# Altium PCB DA_TN.PcbDoc
Units mm, origin at the board's own origin, x right, y up, seen from the top; angles counter-clockwise.
Board outline 99.06 x 62.23 mm, 2 copper layers (Top Layer, Bottom Layer); 55 components, 38 nets, 186 pads, 97 vias.
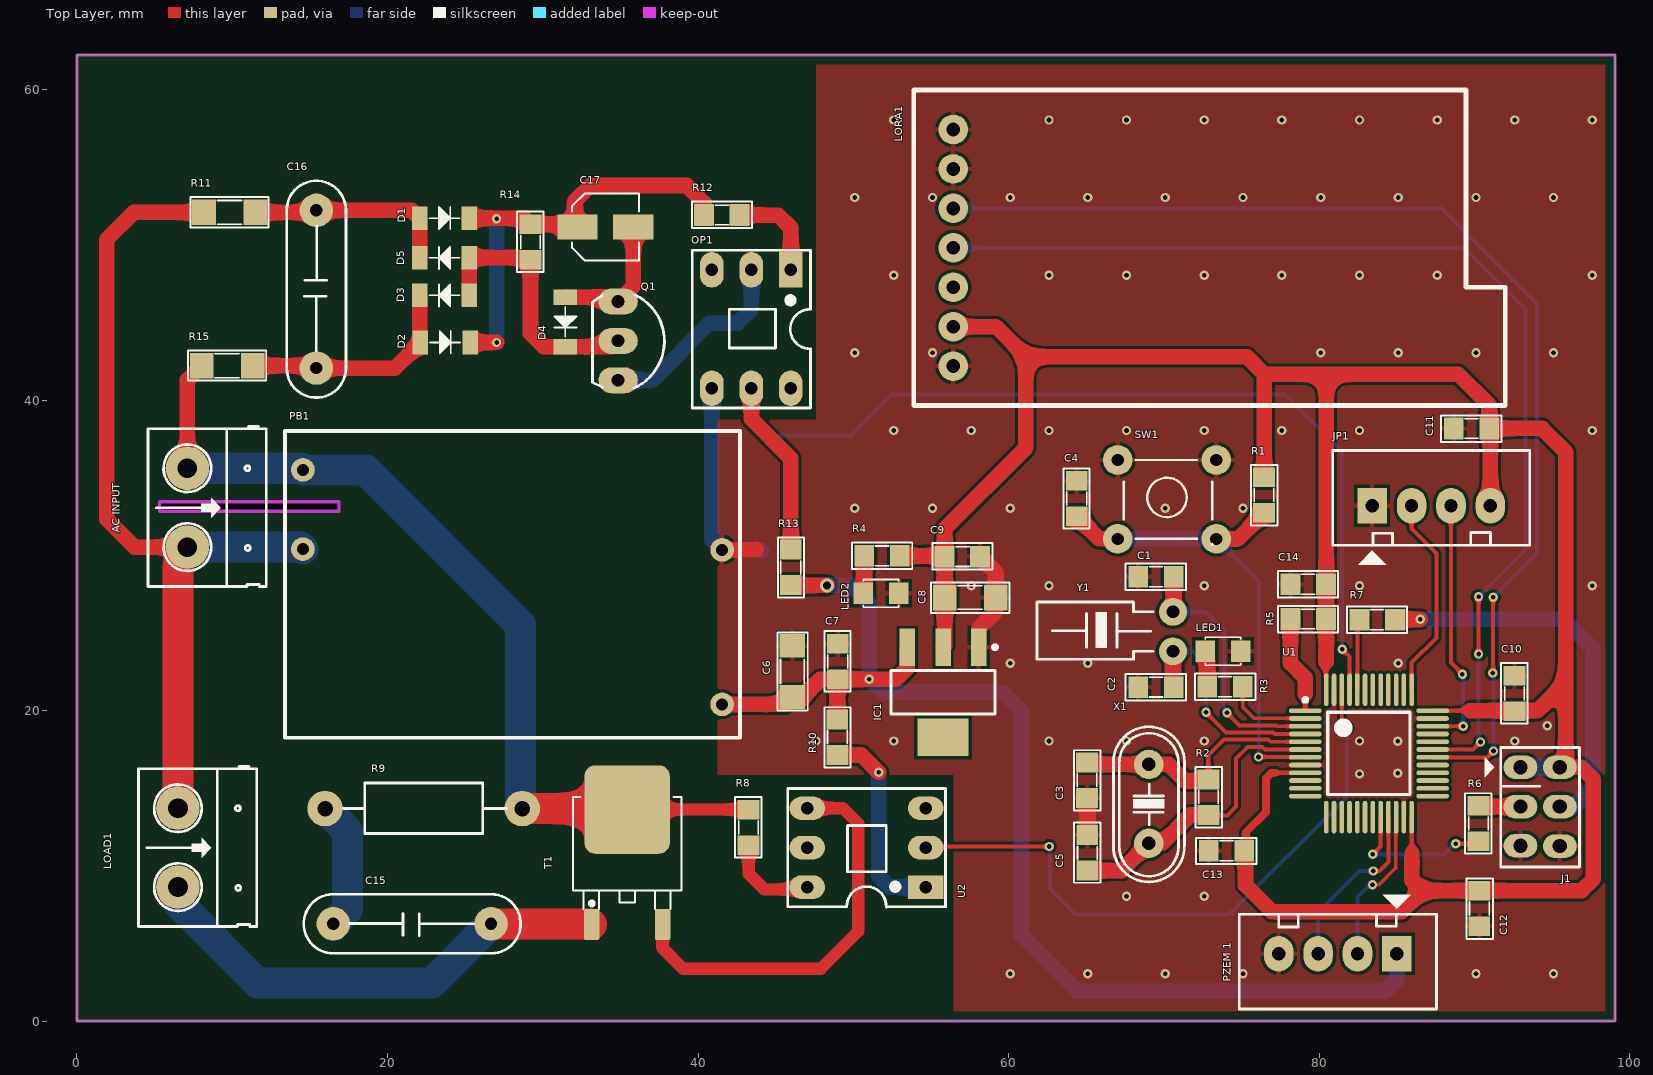
[diagram p0: Top Layer view]
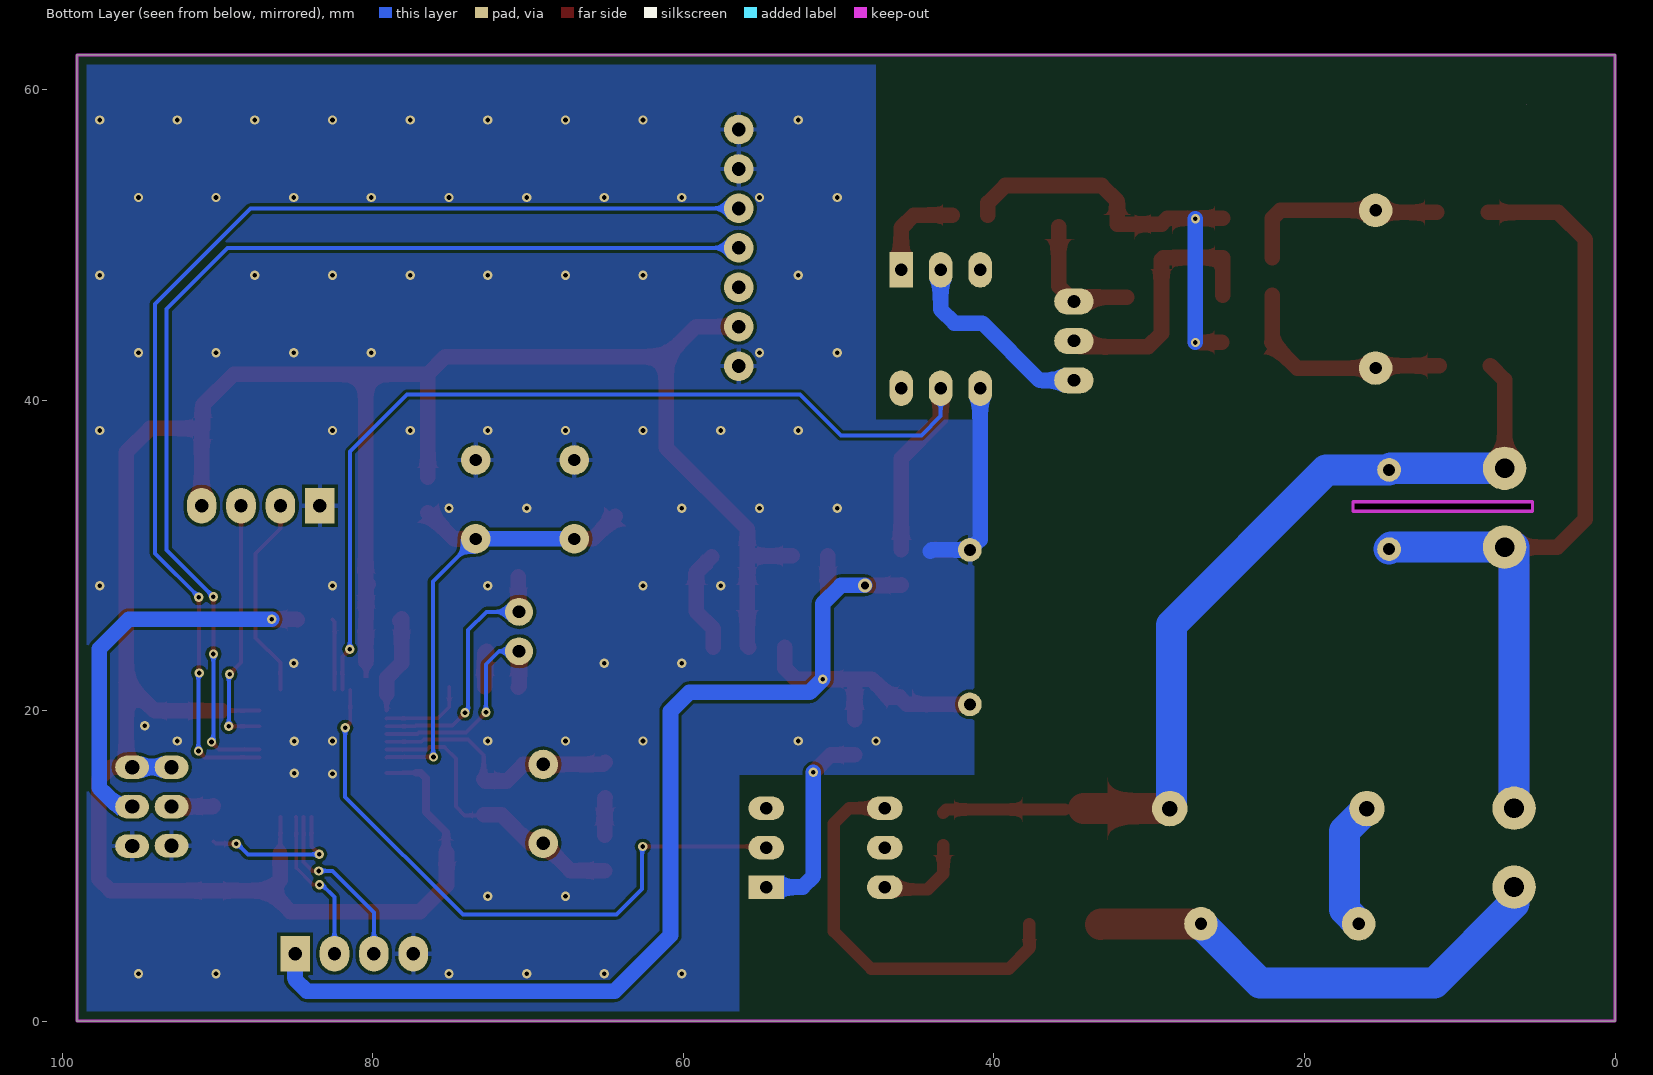
[diagram p1: Bottom Layer view, seen from below]
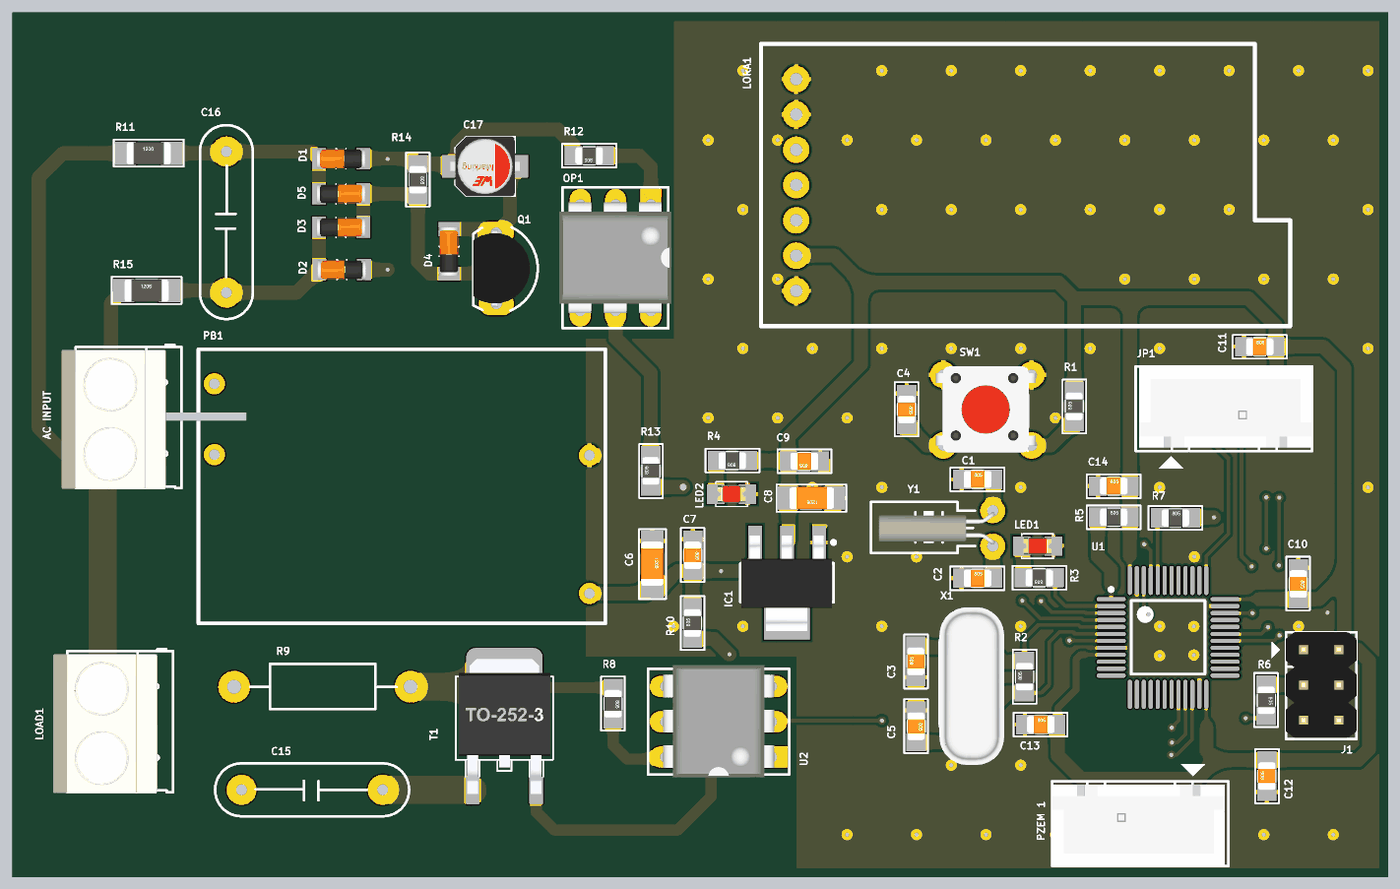
[diagram p2: 3D render of the assembled board from above, using the file's embedded part models]

## Layer stack, top to bottom
Top Solder: solder mask 0.0102, Solder Resist, Dk 3.5
Top Layer: signal copper 0.0356
Dielectric 1: dielectric 0.32, FR-4, Dk 4.8
Bottom Layer: signal copper 0.0356
Bottom Solder: solder mask 0.0102, Solder Resist, Dk 3.5

## Board outline
0,0 99.06,0 99.06,62.23 0,62.23
cut-out: 5.309,33.452 16.866,33.452 16.866,32.842 5.309,32.842

## Design rules (kind name [scope] priority, off if disabled: settings)
Clearance [All] p1: gap=0.2 ignorepadtopadclearanceinfootprint=FALSE
PolygonConnect [All] p1: thpad.connectstyle=Relief thpad.reliefconductorwidth=0.3 thpad.reliefentries=4 thpad.polygonreliefangle="90 Angle" thpad.airgapwidth=0.2 smdpad.connectstyle=Relief smdpad.reliefconductorwidth=0.3 smdpad.reliefentries=4 smdpad.polygonreliefangle="90 Angle" smdpad.airgapwidth=0.2 via.connectstyle=Direct via.reliefconductorwidth=0.3 via.reliefentries=4 via.polygonreliefangle="90 Angle" via.airgapwidth=0.2
RoutingVias [All] p1: holewidth=0.3 width=0.6 viastyle="Through Hole" minholewidth=0.3 minwidth=0.6 maxholewidth=0.3 maxwidth=0.6
SolderMaskExpansion [All] p1: expansion=0.102
Width [All] p1: maxlimit=2 minlimit=0.254 preferedwidth=0.254
30 further rules are at their usual default settings.

## Components (designator, comment, footprint, x,y, rotation, side; value= is the part's Value field where it differs from the comment)
"AC INPUT" "AC INPUT" HED2 7.112,35.611 r270 top value="Header 2"
C1 "20p, 0805" SM-CAP-0805 68.351,28.626 r0 top value=0,1uF/300V
C2 "20p, 0805" SM-CAP-0805 68.351,21.514 r0 top value=0,1uF/300V
C3 "20p, 0805" SM-CAP-0805 65.049,14.376 r90 top value=0,1uF/300V
C4 "105, 0805" SM-CAP-0805 64.389,34.798 r270 top value=0,1uF/300V
C5 "20p, 0805" SM-CAP-0805 65.075,11.989 r270 top value=0,1uF/300V
C6 "10uF, 1206" SM-Cap-1206 46.076,24.181 r270 top value=0,1uF/300V
C7 "0.1uF, 0805" SM-CAP-0805 48.997,24.308 r270 top value=0,1uF/300V
C8 "10uF, 1206" SM-Cap-1206 59.182,27.28 r180 top value=0,1uF/300V
C9 "0.1uF, 0805" SM-CAP-0805 58.166,29.921 r180 top value=0,1uF/300V
C10 "100nF, 0805" SM-CAP-0805 92.583,22.25 r270 top value=0,1uF/300V
C11 "105, 0805" SM-CAP-0805 88.671,38.176 r0 top value=0,1uF/300V
C12 "100nF, 0805" SM-CAP-0805 90.322,6.121 r90 top value=0,1uF/300V
C13 "100nF, 0805" SM-CAP-0805 72.898,10.973 r0 top value=0,1uF/300V
C14 "100nF, 0805" SM-CAP-0805 78.156,28.143 r0 top value=0,1uF/300V
C15 "474" CN4 26.67,6.274 r180 top value=0.47uF
C16 "474" CN4 15.418,42.062 r90 top value=0.47uF
C17 "10uF/10V" CAP-ALU-SMD-4.5x5x1.4 34.039,51.156 r0 top
D1 "LL4148" DIO-SMD-4148 23.673,51.714 r0 top
D2 "LL4148" DIO-SMD-4148 23.724,43.713 r0 top
D3 "LL4148" DIO-SMD-4148 23.673,46.761 r180 top
D4 "LL4148" DIO-SMD-4148 31.445,45.034 r270 top
D5 "LL4148" DIO-SMD-4148 23.673,49.174 r180 top
IC1 "LM1117" SOT223-4N 55.778,21.184 r270 top value=LM317
J1 "Connector 3x2" JP3x2 94.234,13.818 r270 top
JP1 "SWD" CON4 83.414,33.198 r0 top value="Connector 4"
LED1 "LED SMD" SM-LED-0805-Red 72.669,23.825 r0 top
LED2 "LED SMD" SM-LED-0805-Red 50.648,27.559 r0 top
LOAD1 "Header 2" HED2 6.502,13.716 r270 top
LORA1 "SX1278_UART" sx1278_UART 56.439,42.189 r90 top
OP1 "4N35" DIP6/W0.3 45.974,48.387 r180 top
PB1 "PB?" "Module 5V700mA 5V AC*DC" 13.404,18.254 r0 top
"PZEM 1" "JP4" CON4 85.014,4.343 r180 top value="Connector 4"
Q1 "C9014" QTO-92 34.849,43.815 r270 top
R1 "10k, 0805" SM-RES-0805 76.454,32.741 r90 top value="R1/4W - 1K"
R2 "1M, 0805" SM-RES-0805 72.873,13.284 r90 top value="R1/4W - 1K"
R3 "220, 0805" SM-RES-0805 75.082,21.539 r180 top value="R1/4W - 1K"
R4 "220, 0805" SM-RES-0805 52.984,29.972 r180 top value="R1/4W - 1K"
R5 "100k, 0805" SM-RES-0805 78.156,25.908 r0 top value="R1/4W - 1K"
R6 "100k, 0805" SM-RES-0805 90.272,13.868 r270 top value="R1/4W - 1K"
R7 "100k, 0805" SM-RES-0805 82.601,25.857 r0 top value="R1/4W - 1K"
R8 "220, 0805" SM-RES-0805 43.256,13.614 r270 top value="R1/4W - 1K"
R9 "39 1W" R1W 15.977,13.691 r0 top value="R1W - 100"
R10 "220, 0805" SM-RES-0805 48.971,17.145 r90 top value="R1/4W - 1K"
R11 "220k, 1206" SM-RES-1206 8.179,52.095 r0 top value="R1/4W - 1K"
R12 "1k, 0805" SM-RES-0805 42.672,51.918 r180 top value="R1/4W - 1K"
R13 "4.7k, 0805" SM-RES-0805 45.974,28.092 r90 top value="R1/4W - 1K"
R14 "22k, 0805" SM-RES-0805 29.21,51.333 r270 top value="R1/4W - 1K"
R15 "220k, 1206" SM-RES-1206 8.026,42.215 r0 top value="R1/4W - 1K"
SW1 "SW" SW4 67.031,36.144 r0 top value="Button chip 4 pin"
T1 "BT137" TO252-BCE 35.433,9.931 r0 top
U1 "STM32F103C8T6" LQFP48_M 83.21,17.247 r0 top
U2 "MOC3020" DIP6/W0.3 54.661,8.636 r90 top value=MOC3021
X1 "8Mhz" XT2 69.037,13.995 r90 top value=4Mhz
Y1 "XT2" XT32k 70.587,23.825 r180 top

## Footprints (in the part's own frame and the unit in brackets; to place one, negate y for a bottom-side part, rotate by r counter-clockwise, add the part's x,y. Pads: shape width x height; smd on the part's side, far side on the other; paste and mask are expansions set on the pad)
CAP-ALU-SMD-4.5x5x1.4 [mm]
  rect 2.6x1.6 smd: 1(-1.8,0) 2(1.8,0)
  silkscreen extent -2.15,-2.15 2.15,2.15, body extent -2.5,-2.15 2.5,2.15, height 5.45
CN4 [mil] "Cap np W 0.4"
  round 85 hole 31: 1(0,0) 2(400,0)
  silkscreen extent -75,-75 475,75
CON4 [mil] "CON4"
  rect 75x90 hole 34: 1(0,0)
  oval 75x90 hole 34: 2(100,0) 3(200,0) 4(300,0)
  silkscreen extent -100,-150 400,140, body extent -90,-90 398,136, height 276
DIO-SMD-4148 [mm]
  rect 1x1.524 smd: 1(-1.6,0) 2(1.6,0)
  silkscreen extent -0.99,-0.71 0.97,0.74, body extent -1.75,-0.74 1.75,0.71, height 1.41
DIP6/W0.3 [mil] "6 PIN, W 300mil, Pin to pin 100mil"
  rect 60x90 hole 31.5: 1(0,0)
  oval 60x90 hole 31.5: 2(100,0) 3(200,0) 4(200,300) 5(100,300) 6(0,300)
  silkscreen extent -50,-50 250,350, body extent -58,-7 260,307, height 170
HED2 [mil] "Header 2, 2 pin, hight 300mil, Pin to Pin 200, Colour Green"
  round 110 hole 50: 1(0,0) 2(200,0)
  silkscreen extent -106,-100 300,200, body extent -92,-140 302,155, height 394
JP3x2 [mil] "Connector 3x2"
  oval 60x86 hole 36: 1(-100,-50) 2(0,-50) 3(99,-50) 4(-100,50) 5(0,50) 6(100,50)
  silkscreen extent -150,-141 153,100, body extent -150,-100 150,100, height 335
LQFP48_M [mm] "Thin QFP, 48-Leads, Body 7x7mm, Pitch 0.5mm, IPC Low Density"
  oval 2.1x0.3 smd: 1(-4.1,2.75) 2(-4.1,2.25) 3(-4.1,1.75) 4(-4.1,1.25) 5(-4.1,0.75) 6(-4.1,0.25) 7(-4.1,-0.25) 8(-4.1,-0.75) 9(-4.1,-1.25) 10(-4.1,-1.75) 11(-4.1,-2.25) 12(-4.1,-2.75) 25(4.1,-2.75) 26(4.1,-2.25) 27(4.1,-1.75) 28(4.1,-1.25) 29(4.1,-0.75) 30(4.1,-0.25) 31(4.1,0.25) 32(4.1,0.75) 33(4.1,1.25) 34(4.1,1.75) 35(4.1,2.25) 36(4.1,2.75)
  oval 0.3x2.1 smd: 13(-2.75,-4.1) 14(-2.25,-4.1) 15(-1.75,-4.1) 16(-1.25,-4.1) 17(-0.75,-4.1) 18(-0.25,-4.1) 19(0.25,-4.1) 20(0.75,-4.1) 21(1.25,-4.1) 22(1.75,-4.1) 23(2.25,-4.1) 24(2.75,-4.1) 37(2.75,4.1) 38(2.25,4.1) 39(1.75,4.1) 40(1.25,4.1) 41(0.75,4.1) 42(0.25,4.1) 43(-0.25,4.1) 44(-0.75,4.1) 45(-1.25,4.1) 46(-1.75,4.1) 47(-2.25,4.1) 48(-2.75,4.1)
  silkscreen extent -4.22,-2.65 2.65,3.57, body extent -3.5,-3.5 3.5,3.5, height 1.6
"Module 5V700mA 5V AC*DC" [mil]
  round 60 hole 30: 1(45.28,679.13) 2(45.28,478.35) 3(1108.27,476.38) 4(1108.27,84.65)
  silkscreen extent 0,0 1154,778, body extent -70,0 1154,778, height 472
QTO-92 [mil] "TO-92"
  oval 66x100 hole 32: 1(-100,0) 2(0,0) 3(100,0)
  silkscreen extent -117,-65 120,118, body extent -109,-66 109,95, height 245
R1W [mil] "R 1W, 2 pin, 500mil"
  round 90 hole 39.37: 1(0,0) 2(500,0)
  silkscreen extent 46,-63 460,65
SM-CAP-0805 [mil]
  rect 50x55 smd: 1(0,0) 2(90,0)
  silkscreen extent -32,-34 121,33, body extent 6,-25 84,25, height 31
SM-Cap-1206 [mil]
  rect 60x65 smd: 1(0,0) 2(130,0)
  silkscreen extent -34,-38 164,39, body extent 1,-31 127,32, height 40
SM-LED-0805-Red [mil]
  rect 50x55 smd: 1(0,0) 2(90,0)
  silkscreen extent 0,-35 90,35, body extent 5,-25 85,25, height 43
SM-RES-0805 [mil]
  rect 50x55 smd: 1(0,0) 2(90,0)
  silkscreen extent -32,-34 121,33, body extent 6,-25 84,25, height 31
SM-RES-1206 [mil]
  rect 60x65 smd: 1(0,0) 2(130,0)
  silkscreen extent -34,-38 164,39, body extent 2,-31 128,32, height 40
SOT223-4N [mm] "SOT223, 4-Leads, Body 6.5x3.5mm, Pitch 2.3mm, Lead Span 7mm, IPC Medium Density"
  rect 2.4x1 smd: 1(-2.9,2.3) 2(-2.9,0) 3(-2.9,-2.3)
  rect 2.4x3.3 smd: 4(2.9,0)
  silkscreen extent -3.02,-3.35 1.4,3.48, body extent -3.39,-3.27 3.5,3.23, height 1.72
SW4 [mil] "SW button 4pin, 250 x250 mil"
  round 75 hole 31: 1(0,0) 2(250,-200) 3(250,0) 4(0,-200)
  silkscreen extent 15,-215 240,0, body extent -36,-220 276,24, height 276
sx1278_UART [mil] "LORA"
  round 75 hole 35: 1(0,0) 2(100,0) 3(200,0) 4(300,0) 5(400,0) 6(500,0) 7(600,0)
  silkscreen extent -100,-1400 700,100
TO252-BCE [mm]
  round 0.5 on Mech15: 0(0,0)
  rrect25% 1x2 smd: 1(-2.285,-3.7) 3(2.285,-3.7)
  rrect25% 5.5x5.7 smd: 2(0,3.7)
  silkscreen extent -3.5,-2.7 3.5,4.5, body extent -3.3,-3.95 3.3,5.76, height 2.31
XT2 [mil] "Footpin for Crystal 2 pin"
  round 75 hole 34: 1(-100,0) 2(100,0)
  silkscreen extent -198,-90 195,90, body extent -233,-93 213,90, height 138
XT32k [mm]
  round 1.8 hole 0.813: 1(0,0) 2(0,-2.54)
  silkscreen extent 1.27,-3.17 8.76,0.51, body extent -0.15,-2.42 8.2,-0.12, height 1.95

## Part data
"AC INPUT" LOAD1: library part Hed2, "Header 2 (Green)"
C1 C2 C3 C4 C5 C6 C7 C8 C9 C10 C11 C12 C13 C14: library part CN, Designed by=VanDungEvn
C15 C16: library part CN4, "Cap np W0.4"
C17: library part CN-ALU-SMD, "Polarized Capacitor (Axial)", LatestRevisionDate=17-Jul-2002, LatestRevisionNote="Re-released for DXP Platform.", PackageReference=POLAR0.8, Published=8-Jun-2000, Publisher="Altium Limited"
D1 D2 D3 D4 D5: library part "Diode SMD", "STMICROELECTRONICS         1N5711            Small Signal Schottky Diode, Single, 70 V, 15 mA, 410 mV, 200 C", Revision="July-2002: Re-released for DXP Platform."
IC1: "Available in 1.8V, 2.5V, 2.85V, 3.3V, 5V, and  Adjustable Versions"
J1: library part JP3x2
JP1 "PZEM 1": library part Con4, "Connector 4"
LED1 LED2: library part LED-SMD-0805
OP1: "Opto"
PB1: library part "Module 5V 700mA AC-DC"
Q1: library part NPN_EBC, "P 600mW, EBC", =C9012
R1 R2 R3 R4 R5 R6 R7 R8 R10 R12 R13 R14: library part R1/4W, "Resistor 1/4W"
R9: library part R1W, "Resistor 1W"
R11 R15: library part R, "Resistor 1/4W"
SW1: library part SW4, "Switch button 4 pin"
T1: "NXP         BT137-600            Triac, 600 V, 5 W, 1.5 V, TO-220, 65 A"
U1: "STM32 ARM-based 32-bit MCU with 64 Kbytes Flash, 48-pin LQFP, Industrial Temperature", ComponentLink1Description="Manufacturer Link", ComponentLink1URL=www.st.com/stm32, ComponentLink2Description=Datasheet, ComponentLink2URL=http://www.st.com/stonline/products/literature/ds/13587.pdf, DatasheetVersion="rev6, Mar-2008", PackageDescription="48-Pin Low-Profile Quad Flat Pack, 7 x 7 mm Body, 0.5 mm Pitch (LQFP48)", PackageReference=LQFP48, PackageVersion=Mar-2008, Published=30-May-2008, Publisher="Altium Limited"
U2: library part MOC3021, "Single Opto"
X1: library part XT2, "Crystal For all Crystal 2pin."
Y1: "20MHz ±20ppm Crystal 18pF 40 Ohm -20°C ~ 70°C  Surface Mount HC49/US"

## Via types
v1: diameter 0.6, hole 0.3, Top Layer to Bottom Layer, 72 vias
v2: diameter 0.6, hole 0.3, Top Layer to Bottom Layer, tented both sides, 24 vias
v3: diameter 0.9, hole 0.5, Top Layer to Bottom Layer, tented both sides, 1 vias

## Nets (pads, with @x,y where several pads share a name; then routed paths per layer and width w, separated by ;. In a path a pad name is that pad's centre, name@x,y a point inside that pad or via, vN(x,y) a via of type N, cw(c..) or ccw(c..) an arc to the next point about the centre after c; other vN are vias at no path point)
+3.3: C8.2 C9.2 C10.2 C11.2 C12.2 C13.2 C14.2 IC1.2 J1.1 J1.4 JP1.4 LORA1.2 R1.2 R4.1 R5.2 U1.9 U1.24 U1.36 U1.48 | length 175.9
  Top Layer w0.254: 77.191,15.997 U1.9 ; 85.96,11.633 U1.24 ; U1.36 88.741,19.997
  Top Layer w0.5: C13.2@75.286,10.871 75.286,12.167 76.581,13.462 76.581,15.646 76.931,15.997 77.191,15.997 ; 85.96,10.179 85.979,10.16
  Top Layer w1: R4.1 55.829,29.972 C9.2 ; IC1.2 55.88,24.185 C8.2 C9.2 ; LORA1.2 59.182,44.729 61.112,42.799 ; C13.2@75.286,10.871 75.26,10.846 75.26,8.763 76.962,7.061 85.319,7.061 86.665,8.407 ; R1.2 76.454,41.656 ; C14.2@80.289,28.143 C14.2@80.467,28.321 ; C14.2 R5.2 80.46,25.889 80.46,23.673 ; 80.467,27.076 C14.2@80.467,28.321 ; 85.979,10.16 85.979,9.093 86.665,8.407 ; 90.195,19.997 94.063,19.997 95.885,21.819 ; JP1.4 91.034,38.1 C11.2 ; C9.2 55.88,31.699 61.112,36.932 61.112,42.799 ; 61.112,42.799 75.336,42.799 76.454,41.681 76.454,41.656 ; 76.454,41.656 80.467,41.656 ; C14.2@80.467,28.321 80.467,41.656 ; 80.467,41.656 88.976,41.656 90.957,39.675 C11.2 ; 86.665,8.407 C12.2 96.901,8.407 97.663,9.169 97.663,15.57 96.876,16.358 J1.4 95.885,16.739 95.885,21.819 ; C11.2 94.361,38.176 95.885,36.652 95.885,21.819
  Bottom Layer w1: J1.1 J1.4
+5: "PZEM 1.1" C6.2 C7.2 IC1.3 PB1.4 R10.2 R13.1 | length 80
  Top Layer w1: PB1.4 45.601,20.404 C6.2 46.736,20.879 47.879,22.022 C7.2 ; R13.1 45.999,28.067 v3(48.311,28.067) ; R10.2 48.971,21.996 C7.2 ; IC1.3 53.478,22.744 52.756,22.022 v2(51.029,22.022) C7.2
  Bottom Layer w1: v3(48.311,28.067) 49.86,28.067 51.029,26.899 v2(51.029,22.022) 51.867,21.184 59.614,21.184 60.833,19.964 60.833,5.537 64.44,1.93 84.252,1.93 85.014,2.692 85.014,4.343
AC1: "AC INPUT.1" PB1.1 R8.1 R9.2 R15.1 T1.2 | length 58
  Top Layer w0.8: T1.2 43.061,13.631 R8.1@43.282,13.411
  Top Layer w1: 7.112,35.611 7.112,41.3 R15.1
  Top Layer w2: R9.2 T1.2@34.222,13.691
  Bottom Layer w2: 7.112,35.611 14.447,35.611 PB1.1 18.598,35.504 28.575,25.527 28.575,13.792 R9.2
AC2: "AC INPUT.2" LOAD1.1 PB1.2 R11.1 | length 72.9
  Top Layer w1: 7.112,30.531 3.708,30.531 1.905,32.334 1.905,50.343 3.658,52.095 R11.1
  Top Layer w2: LOAD1.1 6.502,29.059 cw(c8.584,29.059) 7.112,30.531
  Bottom Layer w2: LOAD1.1 6.502,30.531 7.112,30.531 14.427,30.531 PB1.2
BOOT0: R7.1 U1.44 | length 4.6
  Top Layer w0.254: U1.44 82.46,25.717 R7.1
BOOT1: R6.2 U1.20 | length 9.8
  Top Layer w0.254: v2(83.464,10.744) 83.96,11.24 U1.20 ; v2(88.798,11.43) 90.119,11.43 R6.2
  Bottom Layer w0.254: v2(83.464,10.744) 88.036,10.744 88.748,11.455 88.773,11.455 v2(88.798,11.43)
DIMMER: U1.46 U2.2 | length 40.7
  Top Layer w0.254: U2.2 54.737,11.252 v2(62.611,11.252) ; U1.46 81.46,19.225 v2(81.788,18.898)
  Bottom Layer w0.254: v2(62.611,11.252) 62.662,11.201 62.662,8.509 64.313,6.858 74.193,6.858 81.788,14.453 v2(81.788,18.898)
GND: "PZEM 1.4" C1.1 C2.1 C3.1 C4.1 C5.1 C6.1 C7.1 C8.1 C9.1 C10.1 C11.1 C12.1 C13.1 C14.1 IC1.1 J1.3 J1.6 JP1.1 LED1.2 LED2.2 LORA1.1 LORA1.6 LORA1.7 OP1.4 PB1.3 SW1.1 SW1.3 U1.8 U1.23 U1.35 U1.47 | length 24.6
  Top Layer w1: PB1.3 43.74,30.354 43.764,30.378 ; IC1.1 58.078,25.287 59.182,26.391 C8.1 59.182,28.905 C9.1 ; C3.1 65.075,14.351 C5.1
  Bottom Layer w1: OP1.4 40.894,31.014 PB1.3 44.017,30.354 44.094,30.277
  other v1: 60.1,3.046 65.1,3.046 70.1,3.046 75.1,3.046 90.1,3.046 95.1,3.046 67.6,8.046 72.6,8.046 82.601,15.926 85.065,15.977 47.6,18.046 52.6,18.046 62.6,18.046 67.6,18.046 72.6,18.046 82.6,18.046 85.065,18.034 92.6,18.046 60.1,23.046 65.1,23.046 85.1,23.046 57.6,28.046 62.6,28.046 72.6,28.046 82.6,28.046 97.6,28.046 50.1,33.046 55.1,33.046 60.1,33.046 70.1,33.046 75.1,33.046 52.6,38.046 57.6,38.046 62.6,38.046 67.6,38.046 72.6,38.046 77.6,38.046 82.6,38.046 97.6,38.046 50.1,43.046 55.1,43.046 80.1,43.046 85.1,43.046 90.1,43.046 95.1,43.046 52.6,48.046 62.6,48.046 67.6,48.046 72.6,48.046 77.6,48.046 82.6,48.046 87.6,48.046 97.6,48.046 50.1,53.046 55.1,53.046 60.1,53.046 65.1,53.046 70.1,53.046 75.1,53.046 80.1,53.046 85.1,53.046 90.1,53.046 95.1,53.046 52.6,58.046 62.6,58.046 67.6,58.046 72.6,58.046 77.6,58.046 82.6,58.046 87.6,58.046 92.6,58.046 97.6,58.046
  other v2: 94.691,19.025
LoraRX: LORA1.5 U1.30 | length 74.6
  Top Layer w0.254: U1.30 90.834,16.997 v2(91.237,17.399) ; v2@91.161,22.25 v2@91.186,22.276 ; v2(91.186,22.428) v2@91.186,22.276 ; v2(91.211,27.305) 91.211,22.301 v2@91.186,22.276
  Bottom Layer w0.254: LORA1.5 87.884,52.349 94.031,46.203 94.031,30.124 v2(91.211,27.305) ; v2(91.186,22.428) 91.288,22.327 91.237,22.276 v2(91.237,17.399)
LoraTX: LORA1.4 U1.31 | length 71
  Top Layer w0.254: U1.31 89.912,17.497 v2(90.399,17.983) ; v2(90.272,23.647) v2(90.272,27.33)
  Bottom Layer w0.254: LORA1.4 89.357,49.809 93.294,45.872 93.294,30.353 v2(90.272,27.33) ; v2(90.272,23.647) 90.272,18.212 90.221,18.161 v2(90.399,17.983)
NetC15_1: C15.1 LOAD1.2 T1.1 | length 31.4
  Top Layer w2: C15.1 33.106,6.274 T1.1
  Bottom Layer w2: LOAD1.2 6.502,7.595 11.633,2.464 22.86,2.464 C15.1
NetC15_2: C15.2 R9.1 | length 8.4
  Bottom Layer w2: R9.1 17.424,12.243 17.424,7.188 C15.2
NetC16_1: C16.1 D2.1 D3.2 R15.2 | length 14.6
  Top Layer w1: R15.2 15.265,42.215 C16.1 20.473,42.062 D2.1 22.073,43.764 D3.2
NetC16_2: C16.2 D1.1 D5.2 R11.2 | length 13.4
  Top Layer w1: R11.2 15.291,52.095 C16.2 21.565,52.222 D1.1 D5.2
NetC17_1: C17.1 D1.2 D2.2 R12.2 R14.1 | length 28.1
  Top Layer w1: D1.2 28.829,51.714 R14.1 32.062,51.333 32.062,52.813 33.071,53.823 39.268,53.823 40.386,52.705 R12.2 ; D2.2 v2(27.026,43.713)
  Bottom Layer w1: v2(27.026,43.713) v2(27.026,51.689)
NetC17_2: C17.2 D4.1 Q1.1 | length 8.7
  Top Layer w1: D4.1 34.57,46.634 Q1.1 35.839,47.346 C17.2
NetD3_1: D3.1 D4.2 D5.1 Q1.2 R14.2 | length 17.3
  Top Layer w1: D3.1 D5.1 29.083,49.174 R14.2 29.21,44.298 30.073,43.434 D4.2 34.468,43.434 Q1.2
NetJ1_2: J1.2 R6.1 | length 2.7
  Top Layer w1: R6.1 90.322,13.818 J1.2
NetJ1_5: J1.5 R7.2 | length 25.1
  Top Layer w1: R7.2 84.912,25.883 v2(86.512,25.883)
  Bottom Layer w1: v2(86.512,25.883) 95.733,25.883 97.638,23.978 97.638,15.037 96.558,13.957 95.644,13.957 J1.5
NetLED1_1: LED1.1 R3.2 | length 2.3
  Top Layer w1: LED1.1 72.796,23.698 R3.2
NetLED2_1: LED2.1 R4.2 | length 2.4
  Top Layer w1: LED2.1 50.698,27.61 R4.2
NetOP1_1: OP1.1 R12.1 | length 6.4
  Top Layer w1: R12.1 45.161,51.918 45.974,51.105 OP1.1
NetOP1_2: OP1.2 Q1.3 | length 13
  Bottom Layer w1: Q1.3 37.059,41.275 40.742,44.958 42.545,44.958 43.434,45.847 OP1.2
NetR5_1: R5.1 U1.1 | length 6.5
  Top Layer w0.254: U1.1 79.11,20.614
  Top Layer w0.5: 79.11,20.614 79.11,21.06
  Top Layer w1: R5.1@78.283,25.781 R5.1 78.156,23.063 79.11,22.109 79.11,21.06
NetR8_2: R8.2 U2.6 | length 6.1
  Top Layer w0.8: R8.2 43.256,9.5 44.272,8.484 46.888,8.484 U2.6
NetR10_1: R10.1 U2.1 | length 13.1
  Top Layer w1: R10.1 50.521,17.145 v2(51.638,16.027)
  Bottom Layer w1: v2(51.638,16.027) 51.638,9.322 52.324,8.636 U2.1
NetT1_3: T1.3 U2.4 | length 26.3
  Top Layer w0.8: T1.3 37.718,4.7 39.04,3.378 47.904,3.378 50.317,5.791 50.317,12.725 49.327,13.716 U2.4
OSCINT: C3.2 R2.2 U1.5 X1.2 | length 16.7
  Top Layer w0.254: R2.2 72.873,17.145 73.877,18.15 76.719,18.15 76.872,17.997 U1.5
  Top Layer w1: C3.2 65.176,16.535 X1.2 70.307,16.535 71.374,15.469 72.771,15.469 R2.2
OSCOUT: C5.2 R2.1 U1.6 X1.1 | length 19.2
  Top Layer w0.254: R2.1 72.898,13.259 74.092,13.259 74.651,13.818 74.651,16.916 75.379,17.645 76.358,17.645 76.507,17.497 U1.6
  Top Layer w1: C5.2 67.285,9.703 X1.1 69.875,11.455 71.704,13.284 R2.1
PC13: R3.1 U1.2 | length 5.6
  Top Layer w0.254: R3.1 75.082,20.244 75.814,19.512 79.095,19.512 U1.2
PC14: C1.2 U1.3 Y1.2 | length 16.9
  Top Layer w0.254: v2(74.066,19.863) 74.871,19.058 77.215,19.058 77.276,18.997 U1.3
  Top Layer w1: Y1.2 70.637,26.416 C1.2
  Bottom Layer w0.254: Y1.2 72.695,26.365 73.863,25.197 73.863,20.066 v2(74.066,19.863)
PC15: C2.2 U1.4 Y1.1 | length 14.9
  Top Layer w0.254: v2(72.72,19.888) 74.005,18.604 77.027,18.604 77.134,18.497 U1.4
  Top Layer w1: Y1.1 70.587,21.565 C2.2
  Bottom Layer w0.254: Y1.1 71.882,23.825 72.72,22.987 v2(72.72,19.888)
"PZEM RX": "PZEM 1.3" U1.21 | length 11.4
  Top Layer w0.254: v2(83.49,9.677) 83.896,9.677 84.46,10.242 U1.21
  Bottom Layer w0.254: 79.934,4.343 79.934,7.01 82.601,9.677 v2(83.49,9.677)
"PZEM TX": "PZEM 1.2" U1.22 | length 10.2
  Top Layer w0.254: v2(83.439,8.788) 83.845,8.788 84.937,9.88 84.937,13.124 U1.22
  Bottom Layer w0.254: 82.474,4.343 82.474,7.996 83.266,8.788 v2(83.439,8.788)
RESET: C4.2 R1.1 SW1.2 SW1.4 U1.7 | length 31.6
  Top Layer w0.254: v2(76.098,17.018) 76.1,17.02 79.087,17.02 U1.7
  Top Layer w1: C4.2 65.837,31.064 SW1.4 ; SW1.2 74.778,31.064 R1.1
  Bottom Layer w0.254: SW1.2 76.124,28.321 76.124,17.043 v2(76.098,17.018)
  Bottom Layer w1: SW1.4 SW1.2
SWCLK: JP1.2 U1.37 | length 13.2
  Top Layer w0.254: JP1.2 85.954,31.725 87.554,30.124 87.554,24.689 85.96,23.095 U1.37
SWDIO: JP1.3 U1.34 | length 16.6
  Top Layer w0.254: U1.34 v2(89.281,18.997) ; JP1.3 88.494,23.089 v2(89.23,22.352)
  Bottom Layer w0.254: v2(89.23,22.352) 89.357,22.352 89.281,22.276 v2(89.281,18.997)
"Zero Crossing": OP1.5 R13.2 U1.45 | length 70
  Top Layer w0.254: v2(81.483,23.952) 81.96,23.475 U1.45
  Top Layer w1: OP1.5 43.434,38.786 45.974,36.246 R13.2
  Bottom Layer w0.254: OP1.5 43.434,38.964 44.679,37.719 49.86,37.719 52.502,40.361 77.8,40.361 81.483,36.678 v2(81.483,23.952)
pads on no net: IC1.4 LORA1.3 OP1.3 OP1.6 T1.0 U1.10 U1.11 U1.12 U1.13 U1.14 U1.15 U1.16 U1.17 U1.18 U1.19 U1.25 U1.26 U1.27 U1.28 U1.29 U1.32 U1.33 U1.38 U1.39 U1.40 U1.41 U1.42 U1.43 U2.3 U2.5

## Polygon pours and split planes (outlines as drawn)
GND on Bottom Layer "Bottom Layer-GND" (solid, remove dead copper, pour order 4): 47.625,61.595 47.625,38.735 41.275,38.735 41.275,15.875 56.413,15.875 56.413,0.635 98.425,0.635 98.425,61.595
no net on Bottom Layer "Bottom Layer-No Net" (solid, pour order 0): 50.165,61.595
GND on Top Layer "Top Layer-GND" (solid, remove dead copper, pour order 2): 47.625,61.595 47.625,38.735 41.275,38.735 41.275,15.875 56.464,15.875 56.464,0.635 98.425,0.635 98.425,61.595

## Keep-outs
Keep-Out Layer:
  region: 5.715,59.055
  lines w0.2: 0,0 0,62.23 99.06,62.23 99.06,0 0,0 ; 5.309,32.842 5.309,33.452 16.866,33.452 16.866,32.842 5.309,32.842

## Other copper
Top Layer:
  region net +3.3: 86.081,11.811 86.081,11.646 ccw(c86.601,11.646) 86.233,11.278 cw(c85.681,10.726) 86.462,10.726 86.487,10.044 cw(c86.392,10.085) 86.324,10.008 85.471,10.008 85.496,9.982 85.496,10.726 cw(c86.277,10.726) 85.725,11.278 ccw(c85.48,11.523) 85.827,11.523 85.827,11.811
  region net +3.3: 88.741,20.136 88.875,20.136 ccw(c88.88,20.843) 89.376,20.34 cw(c89.744,19.972) 89.744,20.492 90.57,20.492 90.57,19.501 90.544,20.405 90.544,19.501 89.763,19.501 cw(c89.763,19.97) 89.432,19.639 ccw(c89.008,19.337) 89.008,19.857 88.741,19.857
  region net +3.3: 80.315,22.123 80.315,22.268 ccw(c79.621,22.268) 80.112,22.758 cw(c80.48,23.126) 79.959,23.126 79.959,23.952 80.95,23.952 80.046,23.927 80.95,23.927 80.95,23.146 cw(c80.481,23.146) 80.813,22.814 ccw(c81.115,22.39) 80.594,22.39 80.594,22.123
  region: 31.064,7.29
  region net +3.3: 88.646,20.117
  region net +3.3: 88.646,20.117
  region net +3.3: 88.741,19.997
  pour cut-out: 5.461,33.452

## Silkscreen, mask and mechanical layers (free items; w line width, h text height)
Bottom Solder:
  lines w2: 6.502,13.716 6.502,30.505 cw(c6.782,30.505) 6.782,30.785